# Altium PCB Приемник.PcbDoc
Units mm, origin at the board's own origin, x right, y up, seen from the top; angles counter-clockwise.
Board outline 66 x 37 mm, 4 copper layers (Top Layer, Int 1, Int 2, Bottom), stack 1.544 mm thick; 102 components, 77 nets, 289 pads, 154 vias.
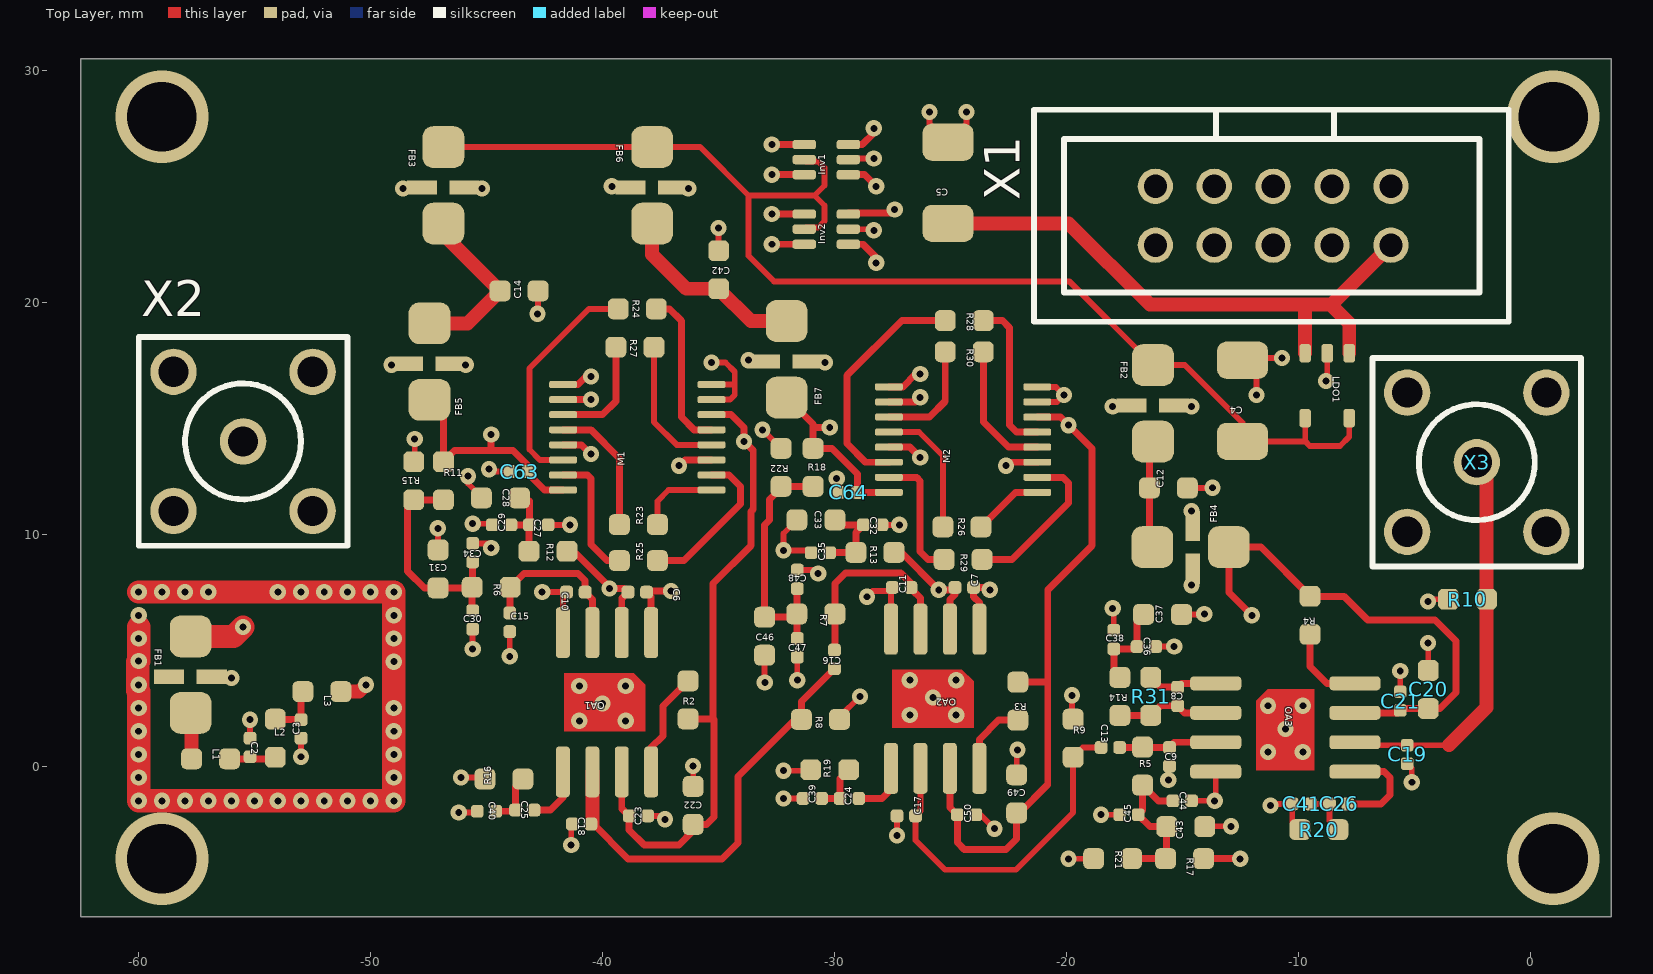
[diagram p0: Top Layer view]
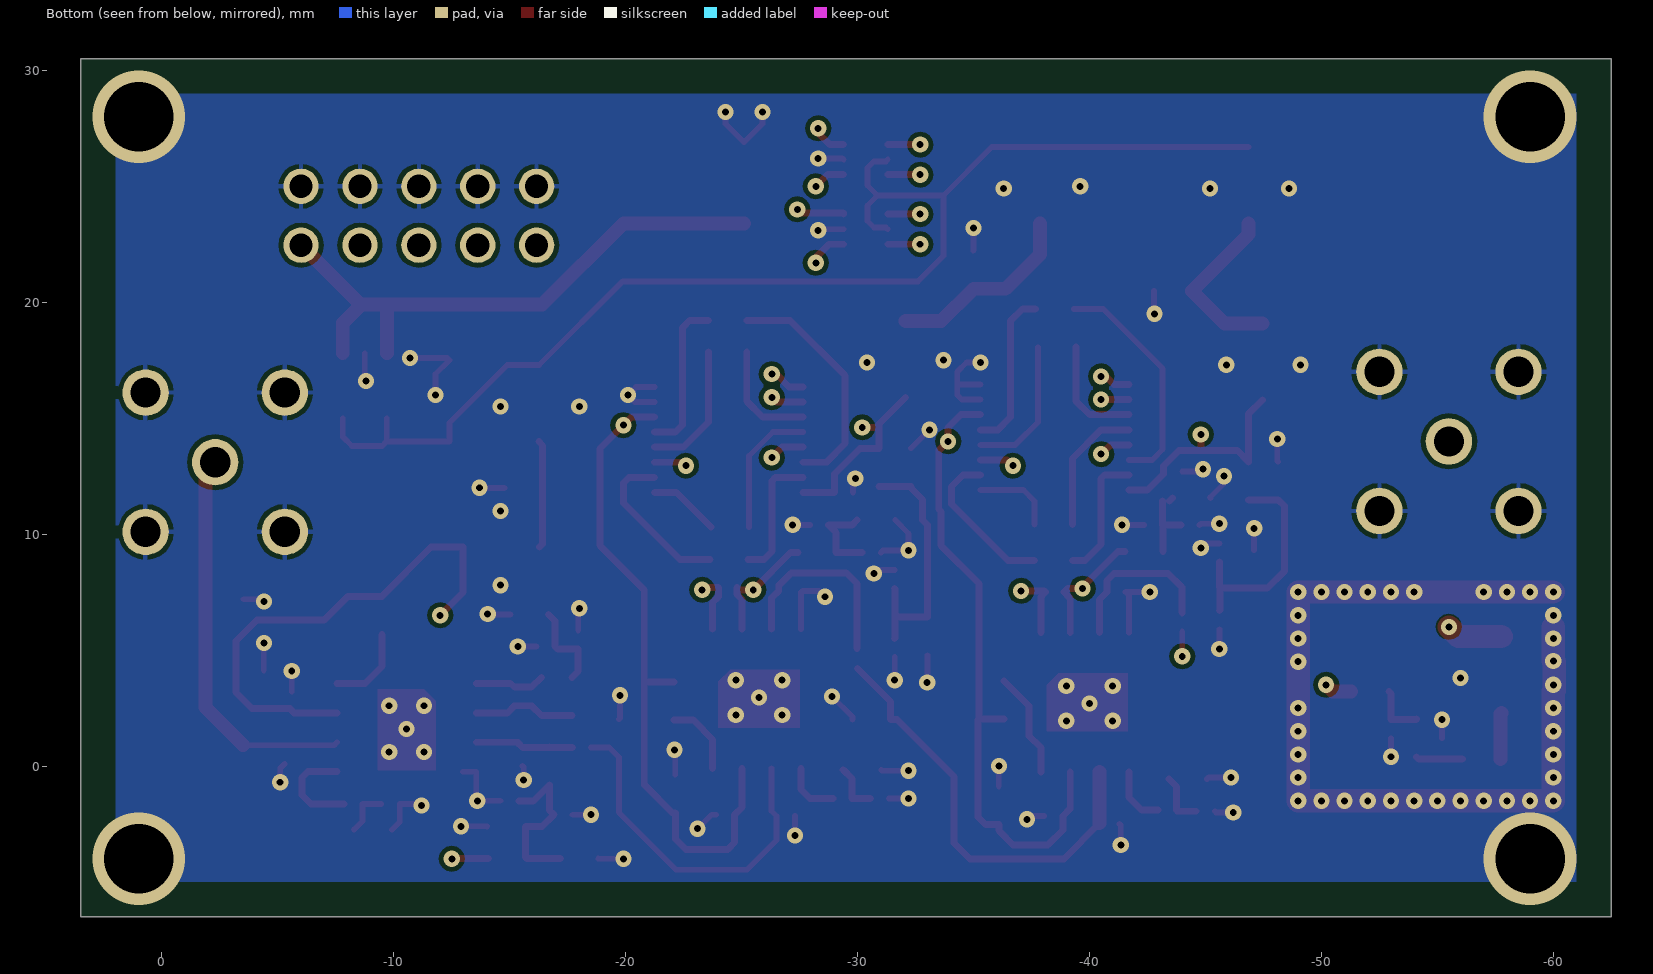
[diagram p1: Bottom view, seen from below]
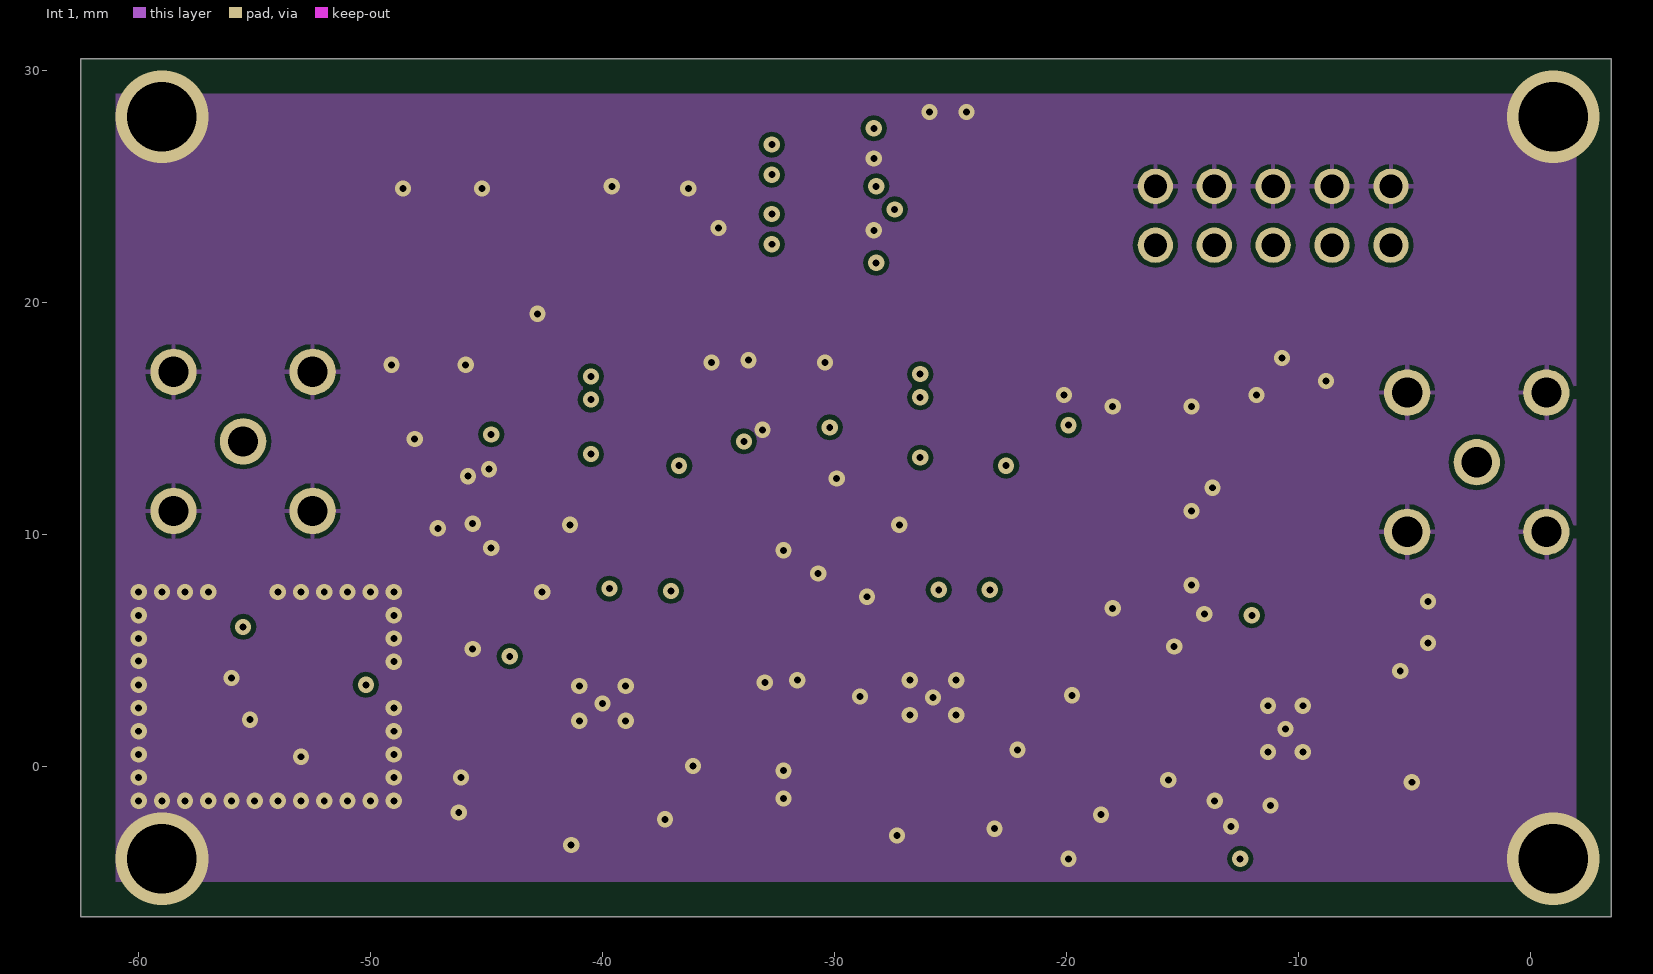
[diagram p2: Int 1]
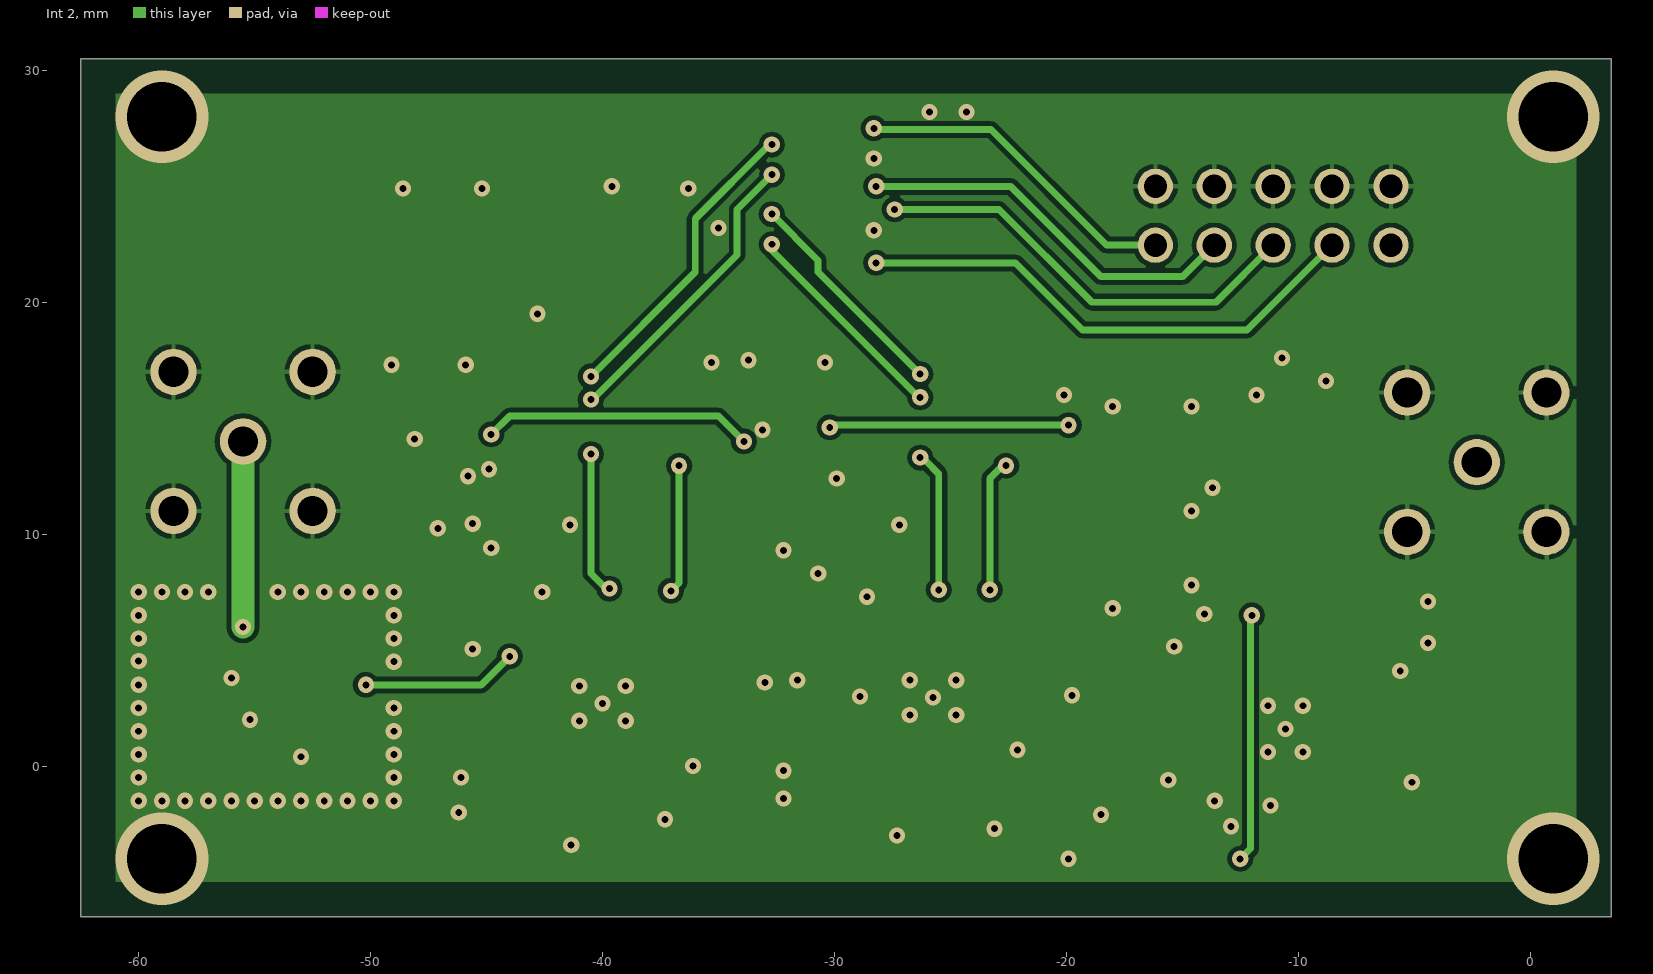
[diagram p3: Int 2]
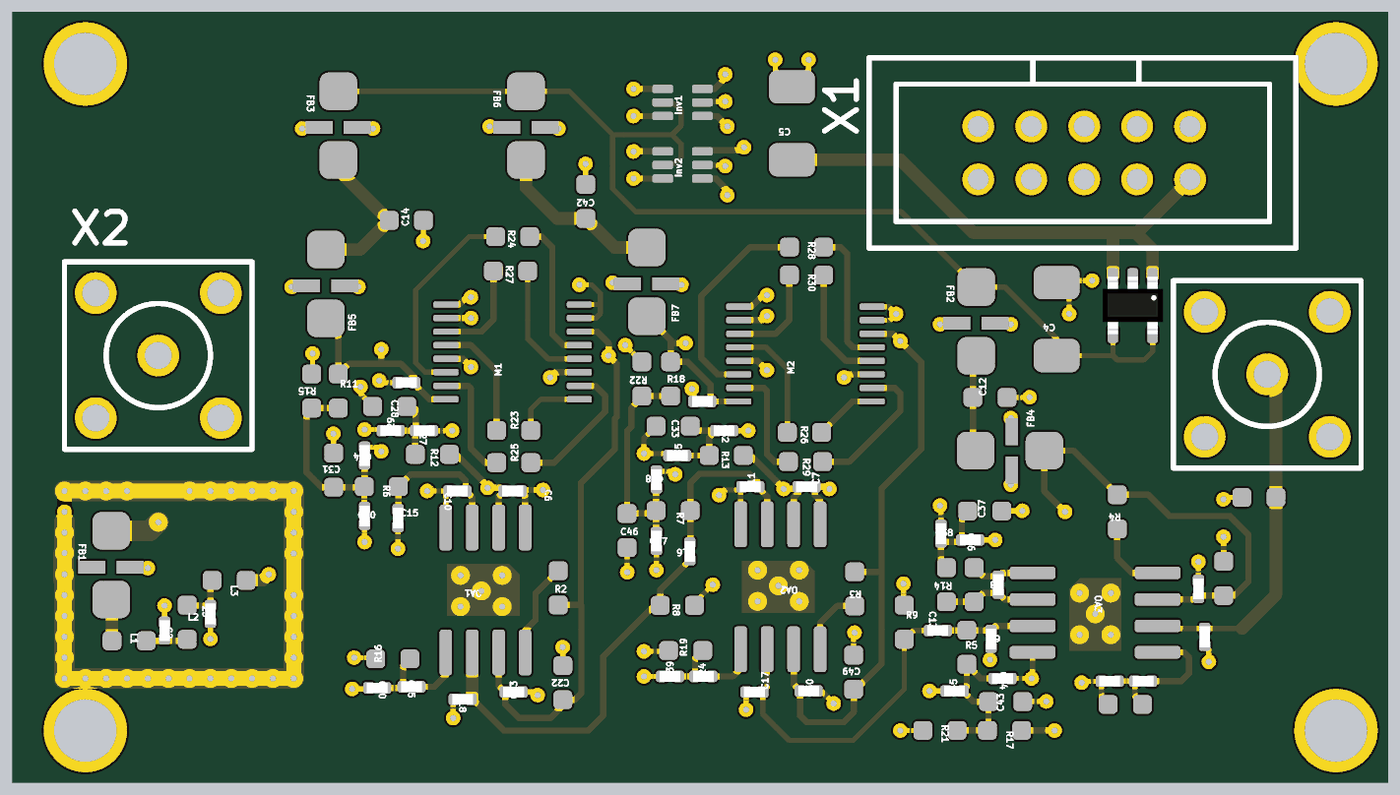
[diagram p4: 3D render of the assembled board from above, using the file's embedded part models]

## Layer stack, top to bottom
Top Layer: signal copper 0.018
Dielectric 1: core 0.254, RO4350, Dk 3.5
Int 1: signal copper 0.018
Dielectric 2: core 0.508, FR4, Dk 5.4
Int 2: signal copper 0.018
Dielectric 3: core 0.71, FR4, Dk 5.4
Bottom: signal copper 0.018

## Board outline
-62.5,-6.5 3.5,-6.5 3.5,30.5 -62.5,30.5

## Design rules (kind name [scope] priority, off if disabled: settings)
Clearance [All] p1: gap=0.2
HoleSize [All] p1: absolutevalues=TRUE maxlimit=2.54 minlimit=0.3 maxpercent=80.000 minpercent=20.000
MinimumSolderMaskSliver [All] p1: minsoldermaskwidth=0.1
PlaneClearance [All] p1: clearance=0.4
PlaneConnect [isVia] p1: planeconnectstyle=Direct reliefexpansion=0.4 reliefentries=4 reliefconductorwidth=0.2 reliefairgap=0.2
PlaneConnect PlaneConnect_1 [All] p2: planeconnectstyle=Relief reliefexpansion=0.4 reliefentries=4 reliefconductorwidth=0.2 reliefairgap=0.2
PolygonConnect [All vs isVia] p1: connectstyle=Direct reliefconductorwidth=0.2 reliefentries=4 polygonreliefangle="90 Angle" airgapwidth=0.2
PolygonConnect PolygonConnect_1 [All] p2: connectstyle=Relief reliefconductorwidth=0.2 reliefentries=4 polygonreliefangle="90 Angle" airgapwidth=0.2
RoomDefinition kam_rx [InComponentClass('kam_rx')] p1: confinementstyle=ConfineIn formatcopy=TRUE lockcomponents=FALSE outline 3.5,-6.5 -62.5,-6.5 -62.5,30.5 3.5,30.5
RoutingVias [All] p1: holewidth=0.3 width=0.7 viastyle="Through Hole" minholewidth=0.3 minwidth=0.7 maxholewidth=2 maxwidth=2.5
SilkToSilkClearance [All] p1: silktosilkclearance=0.1
SilkToSolderMaskClearance [IsPad] p1: minsilkscreentomaskgap=0.2 clearancetoexposedcopper=TRUE
SolderMaskExpansion [All] p1: expansion=0.102
Width [All] p1: maxlimit=5 minlimit=0.2 preferedwidth=0.25
24 further rules are at their usual default settings.

## Components (designator, comment, footprint, x,y, rotation, side; value= is the part's Value field where it differs from the comment)
C2 "150pF" SMD0402 -55.2,1.2 r270 top
C3 "150pF" SMD0402 -53,1.2 r90 top
C4 "47uF" B3528-21 -12.4,17.5 r270 top
C5 "47uF" B3528-21 -25.1,26.9 r270 top
C6 "1pF" SMD0402 -38.1,7.5 r180 top
C7 "1pF" SMD0402 -24.8,7.7 r0 top
C8 "1pF" SMD0402 -15.2,2.6 r90 top
C9 "1pF" SMD0402 -15.55,0 r90 top
C10 "1pF" SMD0402 -40.75,7.5 r180 top
C11 "1pF" SMD0402 -27.5,7.7 r0 top
C12 "10uF" SMD0603 -14.8,12 r180 top
C13 "300pF" SMD0402 -18.5,0.8 r0 top
C14 "10uF" SMD0603 -42.8,20.5 r180 top
C15 "300pF" SMD0402 -44,6.6 r270 top
C16 "300pF" SMD0402 -30,4.2 r90 top
C17 "1pF" SMD0402 -27.3,-2.15 r0 top
C18 "1pF" SMD0402 -40.5,-2.5 r180 top
C19 "1pF" SMD0402 -5.3,0.1 r90 top
C20 "10uF" SMD0603 -4.4,4.1 r270 top
C21 "1nF" SMD0402 -5.6,2.4 r90 top
C22 "10uF" SMD0603 -36.1,-0.9 r270 top
C23 "1nF" SMD0402 -38.85,-2.15 r0 top
C24 "50pF" SMD0402 -29.75,-1.4 r0 top
C25 "50pF" SMD0402 -42.95,-1.9 r180 top
C26 "50pF" SMD0402 -8.655,-1.635 r0 top
C27 "1pF" SMD0402 -42.35,10.4 r180 top
C28 "1uF" SMD0603 -45.2,11.55 r0 top
C29 "1n" SMD0402 -44.75,10.4 r0 top
C30 "1pF" SMD0402 -45.6,5.9 r90 top
C31 "1uF" SMD0603 -47.1,9.3 r270 top
C32 "1pF" SMD0402 -27.95,10.4 r180 top
C33 "1uF" SMD0603 -31.6,10.6 r0 top
C34 "1n" SMD0402 -45.6,9.6 r270 top
C35 "1n" SMD0402 -31,9.2 r0 top
C36 "1pF" SMD0402 -16.15,5.15 r180 top
C37 "1uF" SMD0603 -15.05,6.55 r180 top
C38 "1n" SMD0402 -17.95,5.85 r270 top
C39 "1pF" SMD0402 -31.35,-1.4 r0 top
C40 "1pF" SMD0402 -44.6,-1.95 r180 top
C41 "1pF" SMD0402 -10.255,-1.635 r0 top
C42 "10uF" SMD0603 -35,22.2 r270 top
C43 "1uF" SMD0603 -14.05,-2.6 r180 top
C44 "1pF" SMD0402 -14.6,-1.5 r180 top
C45 "1n" SMD0402 -17.7,-2.1 r0 top
C46 "1uF" SMD0603 -33,4.8 r90 top
C47 "1pF" SMD0402 -31.6,4.7 r90 top
C48 "1n" SMD0402 -31.6,8.45 r270 top
C49 "10uF" SMD0603 -22.15,-0.4 r270 top
C50 "1nF" SMD0402 -24.7,-2.1 r0 top
C63 "1n" SMD0402 -44,12.7 r0 top
C64 "1n" SMD0402 -29.8,11.8 r0 top
FB1 "FB" FV1206 -56.7,1.8 r90 top
FB2 "FB" FV1206 -15.2,13.5 r90 top
FB3 "FB" FV1206 -45.8,22.9 r90 top
FB4 "FB" FV1206 -12.5,10.5 r180 top
FB5 "FB" FV1206 -46.4,15.3 r90 top
FB6 "FB" FV1206 -36.8,22.9 r90 top
FB7 "FB" FV1206 -31,15.4 r90 top
Inv1 "NC7WZ14" SC70 -29.4,25.5 r90 top
Inv2 "NC7WZ14" SC70 -29.4,22.5 r90 top
L1 "200nH" SMD0603 -57.7,0.3 r0 top
L2 "430nH" SMD0603 -54.1,0.4 r90 top
L3 "200nH" SMD0603 -52.9,3.2 r0 top
LDO1 "ADP7118" TSOT5 -7.8,17.8 r270 top
M1 "ADG658_659" TSSOP16 -35.3,11.9 r180 top
M2 "ADG658_659" TSSOP16 -21.25,11.8 r180 top
OA1 "AD8099" SOIC_8_EP -37.9,5.75 r270 top
OA2 "AD8099" SOIC_8_EP -23.75,5.9 r270 top
OA3 "AD8099" SOIC_8_EP -13.555,3.565 r0 top
R2 "50" SMD0603 -36.3,2.05 r90 top
R3 "50" SMD0603 -22.1,3.6 r270 top
R4 "50" SMD0603 -9.5,7.3 r270 top
R5 "100" SMD0603 -16.7,-0.8 r90 top
R6 "100" SMD0603 -45.6,7.7 r0 top
R7 "100" SMD0603 -31.6,6.55 r0 top
R8 "100" SMD0603 -31.4,2 r0 top
R9 "100" SMD0603 -19.7,0.4 r90 top
R10 "100" SMD0603 -1.9,7.2 r180 top
R11 "10k" SMD0603 -46.85,11.5 r90 top
R12 "100" SMD0603 -43.15,9.25 r0 top
R13 "100" SMD0603 -29.05,9.2 r0 top
R14 "100" SMD0603 -17.7,3.8 r270 top
R15 "10k" SMD0603 -48.15,13.1 r270 top
R16 "50" SMD0603 -43.45,-0.55 r180 top
R17 "10k" SMD0603 -15.7,-4 r0 top
R18 "10k" SMD0603 -30.91,12.08 r90 top
R19 "50" SMD0603 -29.4,-0.15 r180 top
R20 "50" SMD0603 -8.305,-2.735 r180 top
R21 "10k" SMD0603 -18.8,-4 r0 top
R22 "10k" SMD0603 -32.31,13.68 r270 top
R23 "1k" SMD0603 -39.25,10.4 r0 top
R24 "5k" SMD0603 -39.3,19.7 r0 top
R25 "15k" SMD0603 -39.25,8.85 r0 top
R26 "1k" SMD0603 -25.3,10.3 r0 top
R27 "40k" SMD0603 -39.4,18.05 r0 top
R28 "5k" SMD0603 -25.2,19.2 r0 top
R29 "15k" SMD0603 -25.25,8.9 r0 top
R30 "40k" SMD0603 -25.2,17.85 r0 top
R31 "50" SMD0603 -16.35,2.2 r90 top
X1 "BH10" BH10 -6,25 r270 top
X2 "MCX 1085221-1" MCX -55.5,14 r0 top
X3 "MCX 1085221-1" MCX -2.3,13.1 r0 top

## Footprints (in the part's own frame and the unit in brackets; to place one, negate y for a bottom-side part, rotate by r counter-clockwise, add the part's x,y. Pads: shape width x height; smd on the part's side, far side on the other; paste and mask are expansions set on the pad)
B3528-21 [mm] "B3528-21"
  rrect50% 1.6x2.2 smd: 1(0,0) 2(3.5,0)
BH10 [mil]
  round 60 hole 39.37: 1(0,0) 2(100,0) 3(0,-100) 4(100,-100) 5(0,-200) 6(100,-200) 7(0,-300) 8(100,-300) 9(0,-400) 10(100,-400)
  silkscreen extent -130,-606 230,200
FV1206 [mm]
  rrect50% 1.8x1.8 smd paste+0: 1(0.49,1.06) 2(3.79,1.06)
  rect 0.61x1.3 smd: 3(2.05,0.15) 4(2.05,1.99)
  body extent 0.57,0.24 3.67,1.84, height 0.55
MCX [mm]
  round 2 hole 1.3: 1(0,0) 2(-3,-3) 2(-3,3) 2(3,-3) 2(3,3)
  silkscreen extent -4.5,-4.5 4.5,4.5
SC70 [mm]
  rrect50% 0.4x1 smd mask+0: 1(0,0) 2(0.65,0) 3(1.3,0) 4(1.3,1.9) 5(0.65,1.9) 6(0,1.9)
SMD0402 [mm]
  rrect50% 0.55x0.55 smd paste+0: 1(0,0) 2(0.8,0)
  body extent -0.1,-0.25 0.9,0.25, height 0.35
SMD0603 [mm]
  rrect50% 0.9x0.9 smd paste+0: 1(-0.02,0.01) 2(1.62,0.01)
  body extent 0,-0.46 1.6,0.44, height 0.45
SOIC_8_EP [mm]
  rrect50% 2.2x0.6 smd: 1(0,0) 2(0,-1.27) 3(0,-2.54) 4(0,-3.81) 5(6,-3.81) 6(6,-2.54) 7(6,-1.27) 8(6,0)
  Top Layer region: 4.25,-3.75 4.25,-0.25 2.25,-0.25 1.75,-0.75 1.75,-3.75
TSOT5 [mm]
  rrect50% 0.8x0.5 smd: 1(0,0) 2(0,-0.95) 3(0,-1.9) 4(2.8,-1.9) 5(2.8,0)
  body extent 0,-2.4 2.78,0.5, height 0.9
TSSOP16 [mm]
  rrect50% 1.2x0.3 smd: 1(0,0) 2(0,-0.65) 3(0,-1.3) 4(0,-1.95) 5(0,-2.6) 6(0,-3.25) 7(0,-3.9) 8(0,-4.55) 9(6.4,-4.55) 10(6.4,-3.9) 11(6.4,-3.25) 12(6.4,-2.6) 13(6.4,-1.95) 14(6.4,-1.3) 15(6.4,-0.65) 16(6.4,0)

## Part data
C2 C3 C6 C7 C8 C9 C10 C11 C13 C15 C16 C17 C18 C19 C21 C23 C24 C25 C26 C27 C29 C30 C32 C34 C35 C36 C38 C39 C40 C41 C44 C45 C47 C48 C50 C63 C64: library part CAP0402
C4 C5: library part CAPT10V4.7-100uF
C12 C14 C20 C22 C28 C31 C33 C37 C42 C43 C46 C49: library part CAP0603
L1 L2 L3: library part IND0603
R2 R3 R4 R5 R6 R7 R8 R9 R10 R11 R12 R13 R14 R15 R16 R17 R18 R19 R20 R21 R22 R23 R24 R25 R26 R27 R28 R29 R30 R31: library part RES0402

## Via types
v1: diameter 0.7, hole 0.3, Top Layer to Bottom, 150 vias
v2: diameter 4, hole 3, Top Layer to Bottom, 4 vias

## Nets (pads, with @x,y where several pads share a name; then routed paths per layer and width w, separated by ;. In a path a pad name is that pad's centre, name@x,y a point inside that pad or via, vN(x,y) a via of type N, cw(c..) or ccw(c..) an arc to the next point about the centre after c; other vN are vias at no path point)
CON1_1: Inv1.3 X1.10 | length 15.7
  Top Layer w0.3: Inv1.3 -28.8,26.8 -28.3,27.3 v1(-28.3,27.5)
  Int 2 w0.3: v1(-28.3,27.5) -28.25,27.45 -23.25,27.45 -18.26,22.46 X1.10
CON1_2: Inv1.1 X1.8 | length 18.2
  Top Layer w0.3: Inv1.1 -28.7,25.5 v1(-28.2,25)
  Int 2 w0.3: v1(-28.2,25) -22.4,25 -18.5,21.1 -14.98,21.1 X1.8
CON2_1: Inv2.3 X1.6 | length 21.1
  Top Layer w0.3: Inv2.3 -29.4,23.85 -27.55,23.85 v1(-27.4,24)
  Int 2 w0.3: v1(-27.4,24) -22.9,24 -18.9,20 -13.54,20 X1.6
CON2_2: Inv2.1 X1.4 | length 24
  Top Layer w0.3: Inv2.1 -28.761,22.5 -28.2,21.939 v1(-28.2,21.7)
  Int 2 w0.3: v1(-28.2,21.7) -22.2,21.7 -19.3,18.8 -12.2,18.8 X1.4
GND: C2.1 C3.1 C4.1 C5.1 C9.1 C10.2 C11.1 C12.1 C14.1 C17.1 C18.2 C19.1 C20.1 C21.2 C22.1 C23.2 C27.1 C28.1 C29.1 C30.1 C31.1 C32.1 C33.1 C34.1 C35.1 C36.1 C37.1 C38.1 C39.1 C40.2 C41.1 C42.1 C43.1 C44.1 C45.1 C46.1 C47.1 C48.1 C49.1 C50.2 C63.1 C64.1 Inv1.2 Inv2.2 LDO1.2 M1.7 M1.8 M2.7 M2.8 OA1.4 OA2.4 OA3.4 R8.2 R9.2 R10.2 R15.1 R16.2 R19.2 R20.2 R21.1 R22.1 X1.1 X1.3 X1.5 X1.7 X1.9 X2.2 X3.2 | length 109.5
  Top Layer w0.25: C2.1 v1(-55.2,2) ; v1(-53,0.4) C3.1 ; R15.1 -48.1,13.16 v1(-48.1,14.1) ; v1(-47.1,10.25) -47.09,10.24 C31.1 ; v1(-46.2,-2) -45.45,-2 C40.2 ; v1(-46.1,-0.5) -45.13,-0.5 R16.2 ; v1(-45.8,12.5) -45.8,12.18 -45.2,11.58 C28.1 ; v1(-45.6,5.05) C30.1 ; C34.1 -44.75,9.6 -44.8,9.55 v1(-44.8,9.4) ; v1(-45.6,10.45) -44.8,10.45 C29.1 ; v1(-44.9,12.8) -44.8,12.7 C63.1 ; v1(-42.8,19.5) -42.78,19.52 C14.1 ; v1(-42.6,7.5) C10.2 -41.71,7.34 OA1.4 ; C27.1 v1(-41.4,10.4) ; v1(-41.35,-3.4) -41.35,-2.55 C18.2 ; C23.2 -37.45,-2.15 v1(-37.3,-2.3) ; C22.1 v1@-36.09,-0.01 ; M1.7 -34.5,15.8 -34.3,16 -34.3,16.5 ; M1.8 -34.35,16.45 -34.3,16.5 ; v1(-35.3,17.4) -34.7,17.4 -34.3,17 -34.3,16.5 ; v1(-35,23.2) -35,22.23 C42.1 ; v1(-33.1,14.5) R22.1 ; C46.1 -33.01,3.61 v1(-33,3.6) ; v1(-32.2,-1.4) C39.1 ; v1(-32.2,-0.2) -31.06,-0.2 R19.2 ; C33.1 -32.2,10.03 v1(-32.2,9.3) -31.1,9.3 C35.1 ; v1(-31.6,3.7) C47.1 ; C48.1 -30.85,8.45 v1(-30.7,8.3) ; v1(-29.9,12.4) -30,12.3 -29.8,12.1 C64.1 ; R8.2 -29.78,2.12 v1(-28.9,3) ; Inv2.2 -28.35,23.15 v1(-28.3,23.1) ; Inv1.2 -29.35,26.2 v1(-28.3,26.2) ; v1(-28.6,7.3) -28.35,7.55 -27.62,7.55 -27.56,7.49 OA2.4 ; C32.1 v1(-27.2,10.4) ; v1(-27.3,-3) C17.1 ; v1(-25.9,28.2) -25.9,27.7 C5.1 -24.3,27.7 v1(-24.3,28.2) ; C50.2 -23.7,-2.1 v1(-23.1,-2.7) ; C49.1 -22.14,0.66 v1(-22.1,0.7) ; M2.7 -20.4,15.7 v1(-20.1,16) -20.45,16.35 M2.8 ; v1(-19.9,-4) -18.83,-4 R21.1 ; v1(-19.75,3.05) -19.75,2.06 R9.2 ; v1(-18.5,-2.1) C45.1 ; v1(-18,6.8) -17.95,6.75 C38.1 ; C36.1 v1(-15.35,5.15) ; v1(-15.6,-0.6) -15.6,-0.05 C9.1 ; C37.1 -14.06,6.54 v1(-14.05,6.55) ; C12.1 -13.71,11.99 v1(-13.7,12) ; C44.1 v1(-13.6,-1.5) -13.555,-1.455 OA3.4 OA3.4@-12.983,-0.245 ; C43.1 -14.02,-2.6 v1(-12.9,-2.6) ; v1(-11.8,16) -11.8,16.9 C4.1 -12.3,17.6 v1(-10.7,17.6) ; v1(-11.2,-1.7) -11.135,-1.635 C41.1 -10.255,-2.415 R20.2 ; v1(-8.8,16.6) -8.75,16.65 LDO1.2 ; C21.2 v1(-5.6,4.1) ; C19.1 -5.1,-0.1 v1(-5.1,-0.7) ; v1(-4.4,5.3) -4.39,5.29 C20.1 ; v1(-4.4,7.1) -4.31,7.19 R10.2
  Top Layer w1: -60,6 v1(-60,4.525) -60.04,4.485 -60.04,3.255 -60,3.215 v1(-60,-1.5) v1(-49,-1.5) v1(-49,7.5) v1(-60,7.5)
  other v1: -59,-1.5 -58,-1.5 -57,-1.5 -56,-1.5 -55,-1.5 -54,-1.5 -53,-1.5 -52,-1.5 -51,-1.5 -50,-1.5 -60,-0.5 -49,-0.5 -36.1,0 -60,0.5 -49,0.5 -11.3,0.6 -9.8,0.6 -60,1.5 -49,1.5 -10.55,1.6 -41,1.95 -39,1.95 -26.75,2.2 -24.75,2.2 -60,2.5 -49,2.5 -11.3,2.6 -9.8,2.6 -40,2.7 -25.75,2.95 -41,3.45 -39,3.45 -60,3.5 -26.75,3.7 -24.75,3.7 -56,3.8 -49,4.5 -60,5.5 -49,5.5 -60,6.5 -49,6.5 -59,7.5 -58,7.5 -57,7.5 -54,7.5 -53,7.5 -52,7.5 -51,7.5 -50,7.5 -14.6,7.8 -14.6,11 -18,15.5 -14.6,15.5 -49.1,17.3 -45.9,17.3 -30.4,17.4 -33.7,17.5 -48.6,24.9 -45.2,24.9 -36.3,24.9 -39.6,25
  other v2: -59,-4 1,-4 -59,28 1,28
NetC1_1: 
NetC1_2: 
NetC2_2: C2.2 L1.2 L2.1 | length 2
  Top Layer w0.3: L1.2 -54.18,0.31 L2.1
NetC3_2: C3.2 L2.2 L3.1 | length 2.4
  Top Layer w0.3: L2.2 -54.09,2 C3.2 -53,3.13 L3.1
NetC4_2: C4.2 FB2.2 FB3.2 FB6.2 Inv1.5 Inv2.5 LDO1.4 LDO1.5 | length 55.9
  Top Layer w0.25: FB3.2 FB6.2 -35.79,26.69 -33.7,24.6 ; Inv2.5 -31.225,23.225 -30.703,23.225 -30.425,23.503 -30.425,24.172 -30.853,24.6 ; Inv1.5 -31.225,26.075 -30.703,26.075 -30.425,25.797 -30.425,25.028 -30.853,24.6 ; LDO1.4 -9.7,14 ; LDO1.5 -7.8,14.2 -8.2,13.8 -9.5,13.8 -9.7,14 ; -33.7,24.6 -33.7,22 -32.6,20.9 -19.87,20.9 FB2.2 -14.89,17.29 -12.4,14.8 C4.2 -9.7,14 ; -33.7,24.6 -30.853,24.6
NetC6_1: C6.1 M1.3 OA1.1 | length 10
  Top Layer w0.3: OA1.1 -37.9,7.3 C6.1 -38.05,7.55 v1(-37.05,7.55) ; v1(-36.7,12.95) -36.45,13.2 M1.3
  Int 2 w0.3: v1(-37.05,7.55) -36.7,7.9 v1(-36.7,12.95)
NetC6_2: C6.2 M1.13 OA1.2 R12.2 | length 12.9
  Top Layer w0.3: M1.13 -40.9,13.85 v1(-40.5,13.45) ; R12.2 -41.232,9.26 -39.7,7.728 v1(-39.7,7.65) -39.05,7.65 C6.2 -39.17,7.23 OA1.2
  Int 2 w0.3: v1(-40.5,13.45) -40.5,8.3 -39.85,7.65 v1(-39.7,7.65)
NetC7_1: C7.1 M2.13 OA2.2 R13.2 | length 12.6
  Top Layer w0.3: M2.13 -26.75,13.75 v1(-26.3,13.3) ; R13.2 -27.11,9.21 v1(-25.5,7.6) -24.9,7.6 C7.1 -24.8,7.4 -25.02,7.18 OA2.2
  Int 2 w0.3: v1@-26.1,13.2 -25.5,12.6 v1(-25.5,7.6)
NetC7_2: C7.2 M2.3 OA2.1 | length 10
  Top Layer w0.3: OA2.1 -23.75,7.05 -24,7.3 C7.2 -23.4,7.7 v1(-23.3,7.6) v1@-23.5,7.6 ; v1(-22.6,12.95) -22.45,13.1 M2.3
  Int 2 w0.3: v1(-23.3,7.6) -23.3,12.4 v1@-22.6,13.1
NetC8_1: C8.1 OA3.2 R14.2 R31.1 | length 4.4
  Top Layer w0.3: R14.2 R31.1 -15.94,2.6 C8.1 -14.895,2.295 OA3.2
NetC8_2: C8.2 OA3.1 R31.2 | length 3
  Top Layer w0.3: R31.2 -15.94,3.4 C8.2 -15.035,3.565 OA3.1
NetC9_2: C9.2 C13.2 OA3.3 R5.2 | length 4.3
  Top Layer w0.3: C13.2 -16.73,0.8 R5.2 -16.69,0.8 C9.2 -15.325,1.025 OA3.3
NetC10_1: C10.1 C15.1 OA1.3 R6.2 | length 7.1
  Top Layer w0.3: C15.1 -43.98,6.62 R6.2 -43.39,8.3 -41.05,8.3 -40.75,8 C10.1 -40.44,7.19 OA1.3
NetC11_2: C11.2 C16.2 OA2.3 R7.2 | length 8.6
  Top Layer w0.3: C16.2@-29.98,5.07 R7.2 -29.98,7.87 -29.525,8.325 -27.14,8.325 -26.6,7.785 -26.6,7.55 -26.29,7.24 OA2.3
NetC12_2: C12.2 FB2.1 FB4.2 | length 4.7
  Top Layer w0.3: FB4.2 -16.42,9.57 C12.2 -16.42,13.83 FB2.1
NetC13_1: C13.1 C17.2 OA2.6 R9.1 | length 15.3
  Top Layer w0.25: OA2.6 -26.29,-1.94 C17.2 -26.5,-3.2 -25.23,-4.47 -22.17,-4.47 -19.71,-2.01 R9.1 -19.29,0.8 C13.1
NetC14_2: C14.2 FB3.1 FB5.2 | length 7.5
  Top Layer w0.6: FB5.2 -45.82,19.09 C14.2 -46.86,22.93 FB3.1
NetC15_2: C15.2 L3.2 | length 9
  Top Layer w0.25: v1(-44,4.73) C15.2
  Top Layer w0.6: L3.2 -50.49,3.21 v1(-50.2,3.5)
  Int 2 w0.3: v1(-50.2,3.5) -45.23,3.5 v1(-44,4.73)
NetC16_1: C16.1 C18.1 OA1.6 R8.1 | length 18.8
  Top Layer w0.3: C18.1@-40.44,-2.465 -38.905,-4 -34.85,-4 -34.16,-3.31 -34.16,-0.46 -31.69,2.01 R8.1 -31.42,2.78 C16.1
  Top Layer w0.6: C18.1@-40.44,-2.465 OA1.6
NetC19_2: C19.2 OA3.6 R10.1 X3.1 | length 17.2
  Top Layer w0.25: OA3.6 -7.43,0.9 C19.2 -3.5,0.9
  Top Layer w0.6: -3.5,0.9 -1.88,2.52 R10.1 -1.88,12.48 X3.1@-2.5,13.1
NetC20_2: C20.2 C21.1 FB4.1 OA3.7 R4.1 R17.2 | length 34.1
  Top Layer w0.3: R17.2 -12.51,-3.99 v1(-12.5,-4) ; v1(-12,6.5) -12.99,7.49 FB4.1 -11.61,9.44 R4.1 -8.02,7.32 -7,6.3 -4.1,6.3 -3.2,5.4 -3.2,3.17 -3.89,2.48 C20.2 -5.52,2.48 C21.1 -5.705,2.295 OA3.7
  Int 2 w0.3: v1(-12.5,-4) -12.05,-3.55 -12.05,6.45 v1(-12,6.5)
NetC22_2: C22.2 C23.1 C63.2 FB5.1 M1.6 M1.16 OA1.7 R2.1 R11.2 | length 49.2
  Top Layer w0.3: FB5.1 -46.86,15.19 R11.2 -46.38,13.6 -44.8,13.6 ; v1(-44.8,14.3) -44.8,13.6 ; M1.16 -42.5,11.9 -43.2,12.6 C63.2 -43.2,12.935 -43.865,13.6 -44.8,13.6 ; OA1.7 -39.17,-1.83 C23.1 -38.85,-2.75 -38.2,-3.4 -36.7,-3.4 -36.09,-2.79 C22.2 -35.52,-2.52 -35.2,-2.2 -35.2,2 -35.23,2.03 ; R2.1 -35.23,2.03 ; M1.6 -34.45,15.15 -33.9,14.6 v1(-33.9,14) -33.5,13.6 -33.5,11.072 -33.6,10.972 -33.6,9.5 -35.23,7.87 -35.23,2.03
  Int 2 w0.3: v1(-44.8,14.3) -44,15.1 -35,15.1 v1(-33.9,14)
NetC24_1: C24.1 C39.2 R19.1 | length 2.2
  Top Layer w0.3: C39.2 C24.1 -29.75,-0.53 R19.1
NetC24_2: C24.2 OA2.5 | length 2.5
  Top Layer w0.3: C24.2 -27.95,-1.4 -27.56,-1.01 OA2.5
NetC25_1: C25.1 OA1.5 | length 2.6
  Top Layer w0.3: C25.1 -42.25,-1.9 -41.71,-1.36 OA1.5
NetC25_2: C25.2 C40.1 R16.1 | length 2.3
  Top Layer w0.3: C40.1 -43.8,-1.95 C25.2 -43.75,-0.88 R16.1
NetC26_1: C26.1 C41.2 R20.1 | length 2.1
  Top Layer w0.254: C41.2 C26.1 -8.655,-2.375 R20.1
NetC26_2: C26.2 OA3.5 | length 4.3
  Top Layer w0.3: C26.2 -6.435,-1.635 -6.05,-1.25 -6.05,-0.5 -6.305,-0.245 OA3.5
NetC27_2: C27.2 C28.2 C29.2 R12.1 | length 3.1
  Top Layer w0.3: C29.2 C27.2 C28.2@-43.15,11.43 ; C28.2 C28.2@-43.45,11.43 ; R12.1 C27.2@-43.17,10.38
NetC30_2: C30.2 C31.2 C34.2 R6.1 R11.1 R15.2 | length 9.7
  Top Layer w0.3: R11.1 R15.2 -48.4,11.22 -48.4,8.4 -47.68,7.68 C31.2 -45.65,7.68 R6.1 ; C30.2 -45.62,6.72 R6.1 ; C34.2 -45.6,7.73 R6.1
NetC32_2: C32.2 C33.2 C35.2 R13.1 | length 3.8
  Top Layer w0.3: C35.2 -29.08,9.2 R13.1 -29.07,10.08 C32.2 -29.77,10.4 C33.2
NetC36_2: C36.2 C37.2 C38.2 R14.1 | length 3.9
  Top Layer w0.3: R14.1 -17.95,4.08 C38.2 -17.05,5.05 C36.2 -16.95,6.26 C37.2
NetC42_2: C42.2 FB6.1 FB7.2 | length 8.3
  Top Layer w0.6: FB6.1 -37.86,22.06 -36.38,20.58 C42.2 -33.6,19.19 FB7.2
NetC43_2: C43.2 C44.2 C45.2 R5.1 R17.1 R21.2 | length 7.3
  Top Layer w0.3: R21.2 R17.1 -15.67,-3.94 C43.2 -16.39,-2.61 C45.2 -16.71,-1.91 R5.1 -16.03,-1.5 C44.2
NetC46_2: C46.2 C47.2 C48.2 R7.1 R18.1 R22.2 | length 10.9
  Top Layer w0.3: C47.2 -31.62,5.52 R7.1 ; C48.2 -31.62,7.63 R7.1 ; R18.1 R22.2 -32.3,11.99 -32.8,11.49 -32.8,10.6 -33.01,10.39 C46.2 -31.76,6.42 R7.1
NetC49_2: C49.2 C50.1 C64.2 FB7.1 M2.6 M2.16 OA2.7 R3.1 R18.2 | length 47
  Top Layer w0.3: FB7.1 -30.92,14.75 -30.92,14.5 ; v1(-30.2,14.6) -30.82,14.6 -30.92,14.5 ; M2.16 C64.2 -29,12.6 -30.1,13.7 R18.2 -30.92,14.5 ; OA2.7 -25.02,-1.78 C50.1 -24.7,-3.3 -24.4,-3.6 -22.6,-3.6 -22.14,-3.14 C49.2 -22.02,-2.02 -20.8,-0.8 -20.8,3.6 ; R3.1 -20.82,3.62 -20.8,3.6 ; M2.6 -20.25,15.05 v1(-19.9,14.7) -18.9,13.7 -18.9,9.5 -20.8,7.6 -20.8,3.6
  Int 2 w0.3: v1(-30.2,14.6) -30.1,14.7 v1(-19.9,14.7)
NetC51_2: 
NetC52_2: 
NetC53_2: 
NetC55_2: 
NetC62_1: 
NetFB1_1: FB1.1 L1.1 | length 2
  Top Layer w0.6: FB1.1 -57.72,2.25 L1.1
NetFB1_2: FB1.2 X2.1 | length 10.4
  Top Layer w1: FB1.2 -55.91,5.59 v1(-55.5,6)
  Int 2 w1: v1(-55.5,6) X2.1
NetInv1_4: Inv1.4 M1.9 | length 16
  Top Layer w0.3: M1.9 -41.05,16.45 -40.7,16.8 v1(-40.5,16.8) ; v1(-32.7,26.8) Inv1.4
  Int 2 w0.3: v1(-40.5,16.8) -36,21.3 -36,23.6 -32.8,26.8 v1(-32.7,26.8)
NetInv1_6: Inv1.6 M1.10 | length 15.6
  Top Layer w0.3: M1.10 v1(-40.5,15.8) ; v1(-32.7,25.5) Inv1.6
  Int 2 w0.3: v1(-40.5,15.8) -40.439,15.8 -34.2,22.039 -34.2,24 v1(-32.7,25.5)
NetInv2_4: Inv2.4 M2.9 | length 12.5
  Top Layer w0.3: v1(-32.7,23.8) Inv2.4 ; M2.9 -27.05,16.35 -26.5,16.9 v1(-26.3,16.9)
  Int 2 w0.3: v1(-32.7,23.8) -30.7,21.8 -30.7,21.3 v1(-26.3,16.9)
NetInv2_6: Inv2.6 M2.10 | length 12.1
  Top Layer w0.3: v1(-32.7,22.5) Inv2.6 ; M2.10 -26.5,15.7 v1(-26.3,15.9)
  Int 2 w0.3: v1(-32.7,22.5) -32.7,22.239 -26.361,15.9 v1(-26.3,15.9)
NetM1_1: M1.1 R23.2 | length 3.5
  Top Layer w0.25: R23.2 -37.63,11.42 -37.15,11.9 M1.1
NetM1_2: M1.2 R25.2 | length 6.8
  Top Layer w0.3: R25.2 -36.49,8.86 -34.05,11.3 -34.05,12.05 -34.55,12.55 M1.2
NetM1_4: M1.4 R27.2 | length 6.1
  Top Layer w0.254: R27.2 -37.78,14.83 -36.8,13.85 M1.4
NetM1_5: M1.5 R24.2 | length 7
  Top Layer w0.3: R24.2 -37.11,19.71 -36.6,19.2 -36.6,15.05 -36.05,14.5 M1.5
NetM1_11: M1.11 R27.1 | length 4.9
  Top Layer w0.3: M1.11 -40,15.15 -39.42,15.73 R27.1
NetM1_12: M1.12 R23.1 | length 5.8
  Top Layer w0.3: M1.12 -40.5,14.5 -39.27,13.27 R23.1
NetM1_14: M1.14 R24.1 | length 10
  Top Layer w0.254: M1.14 -42.7,13.2 -43.15,13.65 -43.15,17.15 -40.59,19.71 R24.1
NetM1_15: M1.15 R25.1 | length 5.6
  Top Layer w0.3: M1.15 -40.65,12.55 -40.5,12.4 -40.5,9.55 -39.81,8.86 R25.1
NetM2_1: M2.1 R26.2 | length 3
  Top Layer w0.3: R26.2 -22.19,11.8 M2.1
NetM2_2: M2.2 R29.2 | length 7
  Top Layer w0.3: R29.2 -22.34,8.91 -19.9,11.35 -19.9,12.2 -20.15,12.45 M2.2
NetM2_4: M2.4 R30.2 | length 5.8
  Top Layer w0.3: R30.2 -23.58,14.83 -22.5,13.75 M2.4
NetM2_5: M2.5 R28.2 | length 6.8
  Top Layer w0.3: R28.2 -22.76,19.21 -22.45,18.9 -22.45,14.7 -22.15,14.4 M2.5
NetM2_11: M2.11 R30.1 | length 4.8
  Top Layer w0.3: M2.11 -25.9,15.05 -25.22,15.73 R30.1
NetM2_12: M2.12 R26.1 | length 5.8
  Top Layer w0.254: M2.12 -26.35,14.4 -25.32,13.37 R26.1
NetM2_14: M2.14 R28.1 | length 10.3
  Top Layer w0.3: M2.14 -28.65,13.1 -29.45,13.9 -29.45,16.85 -27.09,19.21 R28.1
NetM2_15: M2.15 R29.1 | length 5.6
  Top Layer w0.3: M2.15 -26.45,12.45 -26.3,12.3 -26.3,9.25 -25.96,8.91 R29.1
NetMCX1_1: 
NetMCX2_1: 
NetMCX7_1: 
NetMCX8_1: 
NetMIX2_7: 
NetOA1_8: OA1.8 R2.2 | length 4.6
  Top Layer w0.3: OA1.8 -37.9,0.8 -37.4,1.3 -37.4,2.58 R2.2
NetOA2_8: OA2.8 R3.2 | length 3.3
  Top Layer w0.3: OA2.8 -23.75,1.15 -22.92,1.98 R3.2
NetOA3_8: OA3.8 R4.2 | length 3.6
  Top Layer w0.3: R4.2 -9.49,4.29 -8.765,3.565 OA3.8
VIN: C5.2 LDO1.1 LDO1.3 X1.2 | length 26.2
  Top Layer w0.6: C5.2 -19.9,23.4 -16.4,19.9 -9.8,19.9 ; LDO1.3 -9.7,19.8 -9.8,19.9 ; LDO1.1 -7.8,19.1 -8.6,19.9 ; X1.2 -8.56,19.9 -8.6,19.9 ; -9.8,19.9 -8.6,19.9
pads on no net: FB1.3 FB1.4 FB2.3 FB2.4 FB3.3 FB3.4 FB4.3 FB4.4 FB5.3 FB5.4 FB6.3 FB6.4 FB7.3 FB7.4

## Polygon pours and split planes (outlines as drawn)
GND on Int 1 "int2-No Net" (solid, remove dead copper, pour order 5): -61,29 2,29 2,-5 -61,-5
GND on Bottom "int2-No Net" (solid, remove dead copper, pour order 7): -61,29 2,29 2,-5 -61,-5
GND on Int 2 "int2-No Net" (solid, remove dead copper, pour order 9): -61,29 2,29 2,-5 -61,-5

## Silkscreen, mask and mechanical layers (free items; w line width, h text height)
Top Solder:
  lines w0.7: -60,-1.5 -49,-1.5 -49,7.5 -60,7.5 -60,-1.5
Mechanical 13:
  lines w0.5: -61.5,-6.5 3.5,-6.5 3.5,30.5 -61.5,30.5 -61.5,-6.5
Mechanical 15:
  lines w0.01: -109.06,-7.555 -109.06,0.745 -107.41,0.745 ; -109.06,29.945 -109.06,21.645 -107.41,21.645 ; -107.41,6.845 -103.6,6.845 ; -107.41,15.545 -103.6,15.545 ; -103.9,21.395 -103.9,21.645 ; -103.6,0.745 -107.41,0.745 ; -103.6,0.995 -107.41,0.995 -107.41,0.745 ; -103.6,7.095 -107.41,7.095 ; -103.6,15.295 -107.41,15.295 ; -103.6,21.395 -107.41,21.395 -107.41,21.645 ; -103.6,21.645 -107.41,21.645 ; -107.41,0.745 -107.41,7.095 ; -107.41,7.095 -109.06,7.095 -109.06,15.295 -107.41,15.295 ; -107.41,15.295 -107.41,21.645 ; -107.41,5.295 -107.41,5.295